# Altium PCB PCB_RAM & MAR - 1.0_2021-12-04.pcbdoc (part 2 of 2)
Units mm, origin at the board's own origin, x right, y up, seen from the top; angles counter-clockwise.
Board outline 124.59 x 200.53 mm, 2 copper layers (Top Layer, Bottom Layer); 69 components, 120 nets, 333 pads, 65 vias.
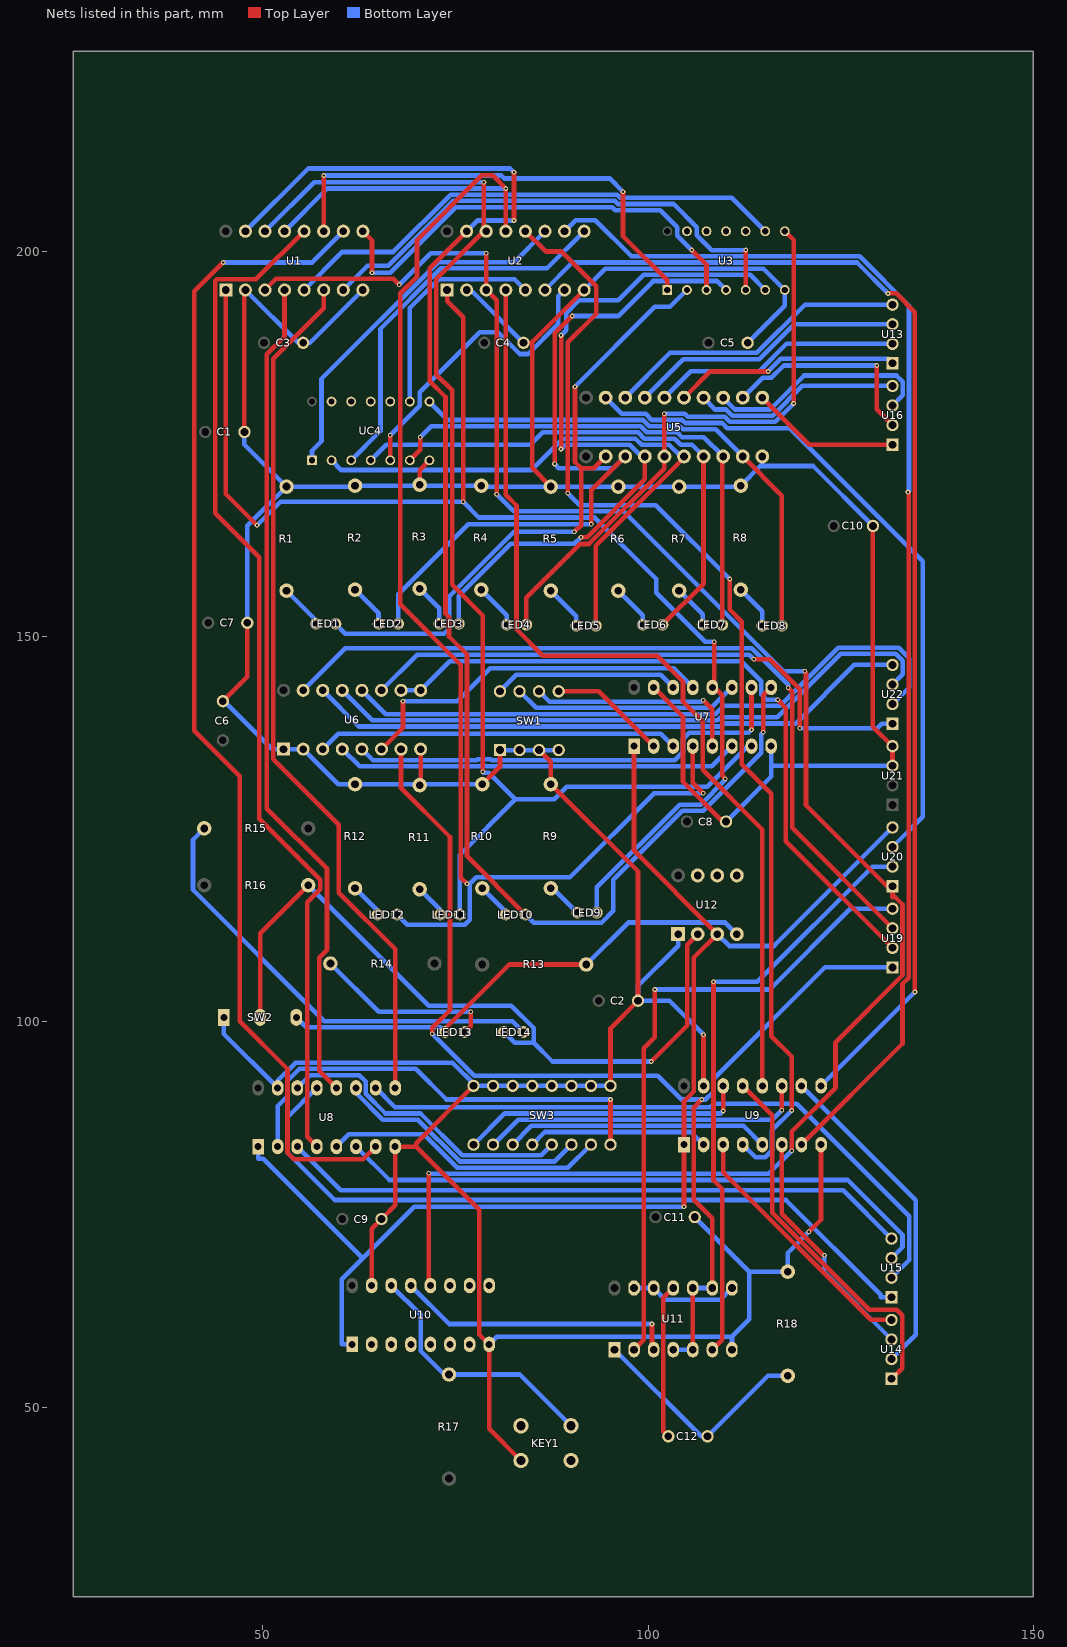
[diagram p2: the nets of this part, all layers, seen from the top]

## Via types
v1: diameter 0.61, hole 0.305, Top Layer to Bottom Layer, 65 vias

## Nets (pads, with @x,y where several pads share a name; then routed paths per layer and width w, separated by ;. In a path a pad name is that pad's centre, name@x,y a point inside that pad or via, vN(x,y) a via of type N, cw(c..) or ccw(c..) an arc to the next point about the centre after c; other vN are vias at no path point) (continued)
GND: C1.2 C2.2 C3.2 C4.2 C5.2 C6.2 C7.2 C8.2 C9.2 C10.2 C11.2 KEY1.1 R1.2 R2.2 R3.2 R4.2 R5.2 R6.2 R7.2 R8.2 R9.2 R10.2 R11.2 R12.2 R18.2 SW1.1 SW1.2 SW1.3 SW1.4 SW2.1 SW3.1 SW3.2 SW3.3 SW3.4 SW3.5 SW3.6 SW3.7 SW3.8 U1.2 U1.8 U2.2 U2.8 U3.7 U5.10 U6.1 U6.2 U6.8 U7.8 U7.15 U8.8 U8.15 U9.8 U9.15 U10.8 U10.15 U11.7 U12.1 U21.3 U21.4 UC4.7 | length 673.4
  Top Layer w0.6: C6.2@44.831,141.605 48.006,144.78 C7.2@48.006,151.765 ; C1.2@47.625,176.53 47.625,194.817 U1.2@47.752,194.944 ; U10.15@64.135,65.786 64.135,73.152 C9.2@65.405,74.422 67.183,76.2 U8.8@67.183,83.82 69.896,83.82 ; R11.2@70.358,130.702 70.485,130.829 U6.8@70.485,135.381 ; R3.2@70.358,169.691 70.358,171.577 UC4.7@71.628,172.847 ; SW3.1@77.343,91.694 69.896,84.247 69.896,83.82 ; R10.2@78.486,130.829 80.773,133.116 SW1.1@80.773,135.256 ; KEY1.1@83.492,43.09 79.375,47.207 U10.8@79.375,58.166 78.105,59.436 78.105,75.611 69.896,83.82 ; C4.2@83.82,188.087 84.941,188.087 ; SW1.3@85.853,135.256 87.376,133.733 87.376,130.829 98.679,119.526 C2.2@98.679,102.743 95.123,99.187 SW3.8@95.123,91.694 ; R5.2@87.376,169.437 84.941,171.872 84.941,188.087 ; U2.8@91.694,194.944 84.941,188.192 84.941,188.087 ; U7.15@100.711,143.383 104.521,139.573 104.521,131.163 109.7,125.984 C8.2@110.109,125.984 ; U9.15@107.188,91.694 v1(107.188,98.322) ; v1(120.846,72.755) 122.428,74.336 U9.8@122.428,84.074 ; C10.2@129.159,164.338 129.159,138.303 U21.4@131.699,135.763 U21.3@131.699,133.223
  Bottom Layer w0.6: C6.2@44.831,141.605 45.03,141.605 51.254,135.381 U6.1@52.705,135.381 U6.2@55.245,135.381 59.797,130.829 61.976,130.829 70.231,130.829 70.358,130.702 70.485,130.829 R10.2@78.486,130.829 ; SW2.1@44.958,100.584 44.958,98.425 U8.15@51.943,91.44 51.943,92.39 54.258,94.705 74.617,94.705 77.628,91.694 SW3.1@77.769,91.694 ; C1.2@47.625,176.53 47.625,174.898 R1.2@53.086,169.437 ; U1.2@47.752,194.944 54.609,188.087 C3.2@55.245,188.087 56.135,188.087 U1.8@62.992,194.944 ; C7.2@48.006,151.765 48.006,164.357 R1.2@53.086,169.437 ; U2.2@76.454,194.944 76.963,194.944 C4.2@83.82,188.087 ; SW3.1@77.343,91.694 SW3.1@77.769,91.694 ; U10.8@79.375,58.166 80.356,59.147 110.871,59.147 ; SW1.1@80.773,135.256 SW1.2@83.313,135.256 SW1.3@85.853,135.256 SW1.4@88.393,135.256 ; U2.8@91.694,194.944 94.457,197.708 114.966,197.708 U3.7@117.729,194.945 117.729,192.913 C5.2@112.903,188.087 ; SW3.8@95.123,91.694 SW3.7@92.583,91.694 SW3.6@90.043,91.694 SW3.5@87.503,91.694 SW3.4@84.963,91.694 SW3.3@82.423,91.694 SW3.2@79.883,91.694 SW3.1@77.769,91.694 ; U12.1@103.886,111.379 103.886,109.878 98.679,104.671 C2.2@98.679,102.743 102.767,102.743 v1(107.188,98.322) ; C11.2@106.045,74.676 113.138,67.583 ; C8.2@110.109,125.984 115.951,131.826 115.951,133.223 ; U11.7@110.871,57.468 110.871,59.147 ; U5.10@114.808,173.355 114.808,172.111 ; U7.8@115.951,135.763 115.951,133.223 ; v1(120.846,72.755) 118.11,70.018 118.11,67.583 113.138,67.583 ; C10.2@129.159,164.338 121.386,172.111 114.808,172.111 ; U21.3@131.699,133.223 115.951,133.223 ; R1.2@53.086,169.437 61.849,169.437 61.976,169.564 70.231,169.564 70.358,169.691 70.485,169.564 78.359,169.564 78.486,169.437 87.376,169.437 96.139,169.437 104.013,169.437 111.887,169.437 112.014,169.564 114.561,172.111 114.808,172.111 ; 110.871,59.147 113.138,61.414 113.138,67.583
KEY1_2: KEY1.2
KEY1_4: KEY1.4
LED5_1: LED5.1 R5.1 | length 5.9
  Bottom Layer w0.6: R5.1@87.376,155.937 90.678,152.635 LED5.1@90.678,151.384
LED6_1: LED6.1 R6.1 | length 5.7
  Bottom Layer w0.6: R6.1@96.139,155.937 99.314,152.762 LED6.1@99.314,151.511
LED7_1: LED7.1 R7.1 | length 5.7
  Bottom Layer w0.6: R7.1@104.013,155.937 107.061,152.889 LED7.1@107.061,151.511
LED8_1: LED8.1 R8.1 | length 5.8
  Bottom Layer w0.6: R8.1@112.014,156.064 114.808,153.27 LED8.1@114.808,151.384
LED13_2: LED13.2 R14.1 | length 23.7
  Top Layer w0.6: LED13.2@76.2,98.679 76.973,99.452 v1(76.973,101.305)
  Bottom Layer w0.6: R14.1@58.782,107.569 65.046,101.305 v1(76.973,101.305)
R1_1: LED1.1 R1.1 | length 5.9
  Bottom Layer w0.6: R1.1@53.086,155.937 56.896,152.127 LED1.1@56.896,151.638
R2_1: LED2.1 R2.1 | length 5.7
  Bottom Layer w0.6: R2.1@61.976,156.064 65.024,153.016 LED2.1@65.024,151.638
R3_1: LED3.1 R3.1 | length 5.6
  Bottom Layer w0.6: R3.1@70.358,156.191 72.898,153.651 LED3.1@72.898,151.638
R4_1: LED4.1 R4.1 | length 5.9
  Bottom Layer w0.6: R4.1@78.359,156.064 81.661,152.762 LED4.1@81.661,151.511
R9_1: LED9.1 R9.1 | length 4.7
  Bottom Layer w0.6: R9.1@87.376,117.329 87.649,117.329 LED9.1@90.805,114.173
R10_1: LED10.1 R10.1 | length 4.7
  Bottom Layer w0.6: R10.1@78.486,117.329 81.534,114.281 LED10.1@81.534,113.919
R11_1: LED11.1 R11.1 | length 4.4
  Bottom Layer w0.6: R11.1@70.358,117.202 73.025,114.535 LED11.1@73.025,113.919
R12_1: LED12.1 R12.1 | length 4.6
  Bottom Layer w0.6: R12.1@61.976,117.329 64.897,114.408 LED12.1@64.897,113.919
R15_1: LED14.2 R15.1 | length 59.1
  Bottom Layer w0.6: R15.1@42.399,125.095 40.949,123.645 40.949,117.113 57.97,100.091 82.408,100.091 LED14.2@83.82,98.679
S$31: 
S$33: 
S$35: 
U1_1: LED9.2 U1.1 U2.1 U7.12 | length 174.2
  Top Layer w0.6: U1.1@45.212,194.944 45.212,168.476 v1(49.261,164.427) ; U2.1@73.914,194.944 73.914,193.493 76.005,191.402 v1(76.005,167.475) ; U7.12@108.331,143.383 U7.12@108.591,143.383 ; v1(108.591,149.305) U7.12@108.591,143.383 ; v1(110.016,131.549) 109.601,131.964 109.601,142.373 U7.12@108.591,143.383
  Bottom Layer w0.6: v1(49.261,164.427) 52.309,167.475 v1(76.005,167.475) 78.06,165.42 93.059,165.42 101.034,157.445 101.034,155.656 107.385,149.305 v1(108.591,149.305) ; LED9.2@93.345,114.173 93.345,117.442 104.085,128.182 106.808,128.182 110.016,131.389 v1(110.016,131.549)
U1_3: U1.3 U2.3 U10.12 U20.1 | length 249.9
  Top Layer w0.6: U1.3@50.292,194.944 51.725,196.378 66.957,196.378 v1(67.693,195.642) ; v1(71.555,80.376) 71.555,65.986 U10.12@71.755,65.786 ; v1(78.994,199.725) U2.3@78.994,194.944 80.338,193.6 v1(80.338,168.426) ; v1(118.618,83.293) 118.618,85.774 124.31,91.466 124.31,97.362 133.001,106.053 133.001,115.224 132.025,116.2 131.699,116.2 U20.1@131.699,116.901 ; v1(120.302,145.466) 120.475,145.292 120.475,128.125 U20.1@131.699,116.901 ; U20.1@131.699,117.602 U20.1@131.699,116.901
  Bottom Layer w0.6: v1(67.693,195.642) 71.776,199.725 v1(78.994,199.725) ; v1(71.555,80.376) 71.647,80.284 115.609,80.284 v1(118.618,83.293) ; v1(80.338,168.426) 82.542,166.223 96.801,166.223 117.559,145.466 v1(120.302,145.466)
U1_4: U1.4 U8.12 | length 109.1
  Top Layer w0.6: U1.4@52.832,194.944 52.832,188.912 50.519,186.599 50.519,127.663 58.345,119.837 58.345,109.329 57.321,108.305 57.321,93.682 U8.12@59.563,91.44
U1_5: U1.5 U3.9 | length 66.9
  Bottom Layer w0.6: U1.5@55.372,194.944 60.304,199.876 66.95,199.876 74.373,207.299 95.997,207.299 96.4,206.896 110.858,206.896 U3.9@115.189,202.565
U1_6: U1.6 U8.9 | length 112.8
  Top Layer w0.6: U1.6@57.912,194.944 57.912,192.596 51.347,186.031 51.347,134.067 59.87,125.545 59.87,116.762 67.183,109.448 U8.9@67.183,91.44
U1_7: U1.7 U3.5 | length 65.4
  Top Layer w0.6: U3.5@112.649,194.945 v1(112.649,200.121)
  Bottom Layer w0.6: U1.7@60.452,194.944 63.592,198.084 66.293,198.084 74.705,206.496 95.665,206.496 96.068,206.093 103.306,206.093 106.299,203.1 106.299,202.055 108.233,200.121 v1(112.649,200.121)
U1_9: U1.9 U3.3 | length 59.8
  Top Layer w0.6: U1.9@62.992,202.565 64.18,201.377 v1(64.18,197.185) ; v1(105.64,200.121) 107.569,198.192 U3.3@107.569,194.945
  Bottom Layer w0.6: v1(64.18,197.185) 66.529,197.185 75.038,205.694 95.333,205.694 95.736,205.29 101.572,205.29 103.759,203.103 103.759,202.002 v1(105.64,200.121)
U1_10: U1.10 U8.7 | length 151.8
  Top Layer w0.6: v1(44.87,198.514) 41.111,194.755 41.111,137.777 47.024,131.865 47.024,100.076 53.213,93.887 53.213,83.031 54.058,82.186 63.009,82.186 U8.7@64.643,83.82
  Bottom Layer w0.6: v1(44.87,198.514) 56.402,198.514 U1.10@60.452,202.565
U1_11: U1.11 U3.1 | length 62.1
  Top Layer w0.6: U1.11@57.912,202.565 v1(57.912,209.792) ; v1(96.734,207.703) 96.734,201.936 102.489,196.181 U3.1@102.489,194.945
  Bottom Layer w0.6: v1(57.912,209.792) 80.954,209.792 81.333,209.413 95.024,209.413 v1(96.734,207.703)
U1_12: U1.12 U8.4 | length 133.4
  Top Layer w0.6: U1.12@55.372,202.565 49.12,196.313 44.035,196.313 43.86,196.137 43.86,165.981 49.562,160.279 49.562,126.35 57.461,118.451 57.461,117.21 55.753,115.502 55.753,85.09 U8.4@57.023,83.82
U1_13: LED12.2 U1.13 U2.13 U7.4 | length 197.3
  Top Layer w0.6: v1(76.506,117.906) 75.703,118.709 75.703,146.297 67.828,154.173 67.828,194.506 70.008,196.686 70.008,201.404 78.41,209.806 79.835,209.806 v1(81.534,208.107) U2.13@81.534,202.565 ; U7.4@105.791,135.763 105.791,131.034 v1(107.155,129.67)
  Bottom Layer w0.6: U1.13@52.832,202.565 58.374,208.107 v1(81.534,208.107) ; LED12.2@67.437,113.919 68.744,112.612 76.207,112.612 76.843,113.248 76.843,117.906 ; v1(76.506,117.906) 76.843,117.906 ; v1(107.155,129.67) 100.764,129.67 89.865,118.771 77.708,118.771 76.843,117.906
U1_14: LED11.2 U1.14 U2.14 U7.7 | length 170
  Top Layer w0.6: v1(78.536,132.436) 78.536,152.712 74.563,156.686 74.563,181.913 72.504,183.971 72.504,196.373 U2.14@78.695,202.564 ; v1(78.695,208.935) U2.14@78.695,202.564 ; U2.14@78.994,202.565 U2.14@78.695,202.564
  Bottom Layer w0.6: U1.14@50.292,202.565 56.663,208.935 v1(78.695,208.935) ; LED11.2@75.565,113.919 75.565,121.647 82.781,128.864 ; v1(78.536,132.436) 78.639,132.333 79.311,132.333 82.781,128.864 ; U7.7@113.411,135.763 112.941,135.763 107.655,130.478 89.437,130.478 87.824,128.864 82.781,128.864
U1_15: LED10.2 U1.15 U2.15 U7.9 | length 198.7
  Top Layer w0.6: U2.15@76.454,202.565 71.657,197.768 71.657,183.116 73.712,181.061 73.712,152.95 74.168,152.494 74.168,149.993 76.506,147.654 76.506,121.487 LED10.2@84.074,113.919 ; v1(82.592,203.95) v1(82.592,210.221) ; v1(114.93,137.588) 114.93,142.362 U7.9@115.951,143.383
  Bottom Layer w0.6: U1.15@47.752,202.565 55.896,210.708 82.104,210.708 v1(82.592,210.221) ; U2.15@76.454,202.565 77.839,203.95 v1(82.592,203.95) ; LED10.2@84.074,113.919 85.149,112.844 93.943,112.844 95.485,114.386 95.485,118.448 104.417,127.379 107.141,127.379 114.681,134.92 114.681,137.339 v1(114.93,137.588)
U2_4: U2.4 U9.12 | length 125.7
  Top Layer w0.6: U2.4@81.534,194.944 81.534,168.372 82.926,166.981 82.926,150.911 86.347,147.49 101.174,147.49 104.521,144.143 104.521,141.528 107.061,138.988 107.061,132.699 114.808,124.952 U9.12@114.808,91.694
U2_5: U2.5 UC4.9 | length 29.3
  Bottom Layer w0.6: UC4.9@69.088,180.467 69.088,192.605 72.84,196.356 82.662,196.356 U2.5@84.074,194.944
U2_6: U2.6 U9.9 | length 157.6
  Top Layer w0.6: v1(131.106,194.496) 132.166,194.496 134.607,192.055 v1(134.607,103.873)
  Bottom Layer w0.6: U2.6@86.614,194.944 90.18,198.511 127.092,198.511 v1(131.106,194.496) ; U9.9@122.428,91.694 v1(134.607,103.873)
U2_7: U2.7 UC4.5 | length 39.1
  Top Layer w0.6: UC4.5@66.548,172.847 v1(66.548,176.116)
  Bottom Layer w0.6: v1(66.548,176.116) 70.358,179.926 70.358,181.686 78.142,189.469 80.514,189.469 83.344,186.639 84.425,186.639 88.351,190.566 88.351,194.142 U2.7@89.154,194.944
U2_9: U2.9 UC4.3 | length 50.3
  Bottom Layer w0.6: UC4.3@61.468,172.847 65.278,176.657 65.278,189.93 73.099,197.751 86.881,197.751 U2.9@91.694,202.565
U2_10: U2.10 U9.7 | length 164.6
  Top Layer w0.6: U9.7@119.888,84.074 133.001,97.187 133.001,104.918 133.804,105.721 133.804,168.625 v1(133.704,168.725)
  Bottom Layer w0.6: U2.10@89.154,202.565 90.592,204.002 93.156,204.002 97.845,199.314 127.431,199.314 133.84,192.904 133.84,168.861 v1(133.704,168.725)
U2_11: U2.11 UC4.1 | length 48
  Bottom Layer w0.6: UC4.1@56.388,172.847 56.388,174.083 57.624,175.32 57.624,183.412 72.767,198.554 82.604,198.554 U2.11@86.614,202.565
U2_12: U2.12 U9.4 | length 149.5
  Top Layer w0.6: U2.12@84.074,202.565 86.696,199.942 88.714,199.942 93.246,195.41 93.246,191.826 89.587,188.167 v1(89.587,168.573) ; v1(110.572,157.445) 110.572,153.496 112.141,151.927 112.141,133.402 115.979,129.564 115.979,98.143 118.618,95.504 v1(118.618,88.496)
  Bottom Layer w0.6: v1(89.587,168.573) 91.134,167.026 100.991,167.026 v1(110.572,157.445) ; U9.4@112.268,84.074 113.928,82.414 115.183,82.414 116.06,83.292 116.06,85.939 v1(118.618,88.496)
U3_10: U3.10
U3_11: U3.11
U3_12: U3.12
U3_13: U3.13
U5_2: LED1.2 U3.2 U5.2 | length 82.5
  Top Layer w0.6: v1(90.434,163.563) 91.312,164.441 91.312,171.82 ; v1(90.506,182.391) 90.506,172.626 91.312,171.82 ; U5.2@94.488,173.355 92.953,171.82 91.312,171.82
  Bottom Layer w0.6: LED1.2@59.436,151.638 60.71,150.364 73.513,150.364 74.168,151.019 74.168,155.132 82.599,163.563 v1(90.434,163.563) ; v1(90.506,182.391) 100.867,192.751 102.835,192.751 U3.2@105.029,194.945
U5_3: LED2.2 U3.4 U5.3 | length 95.8
  Top Layer w0.6: v1(87.864,172.381) 87.864,189.354 90.071,191.561 v1(90.165,191.561) ; v1(92.627,164.574) 92.627,168.954 U5.3@97.028,173.355
  Bottom Layer w0.6: LED2.2@67.564,151.638 67.564,155.462 76.676,164.574 v1(92.627,164.574) ; v1(87.864,172.381) 88.427,171.818 95.491,171.818 U5.3@97.028,173.355 ; v1(90.165,191.561) 96.095,191.561 100.636,196.102 108.952,196.102 U3.4@110.109,194.945
U5_4: LED3.2 U3.6 U5.4 | length 95.3
  Top Layer w0.6: v1(88.702,174.308) v1(88.702,189.051) ; v1(91.287,162.884) 92.079,162.884 99.568,170.373 U5.4@99.568,173.355
  Bottom Layer w0.6: LED3.2@75.438,151.638 75.438,155.267 82.177,162.006 90.409,162.006 v1(91.287,162.884) ; v1(88.702,174.308) 89.252,174.858 97.627,174.858 99.131,173.355 U5.4@99.568,173.355 ; v1(88.702,189.051) 89.356,189.704 89.356,191.92 91.028,193.592 96.097,193.592 99.41,196.905 113.229,196.905 U3.6@115.189,194.945
U5_5: LED4.2 U3.8 U5.5 | length 76.5
  Top Layer w0.6: LED4.2@84.201,151.511 84.201,155.006 91.193,161.998 92.328,161.998 102.108,171.778 U5.5@102.108,173.355 v1(102.108,178.877) ; U3.8@117.729,202.565 118.867,201.427 v1(118.867,180.213)
  Bottom Layer w0.6: v1(102.108,178.877) 104.766,178.877 105.157,178.486 109.942,178.486 110.603,177.826 116.48,177.826 v1(118.867,180.213)
U5_6: LED5.2 U5.6 UC4.2 | length 75.6
  Top Layer w0.6: LED5.2@93.218,151.384 93.218,161.753 104.648,173.183 U5.6@104.648,173.355
  Bottom Layer w0.6: UC4.2@58.928,172.847 60.191,171.584 84.837,171.584 88.914,175.661 98.361,175.661 99.164,174.858 102.707,174.858 104.211,173.355 U5.6@104.648,173.355
U5_7: LED6.2 U5.7 UC4.4 | length 70
  Top Layer w0.6: LED6.2@101.854,151.511 107.188,156.845 U5.7@107.188,173.355
  Bottom Layer w0.6: UC4.4@64.008,172.847 66.019,174.858 84.716,174.858 86.321,176.464 98.693,176.464 99.496,175.661 103.441,175.661 104.244,174.858 105.685,174.858 U5.7@107.188,173.355
U5_8: LED7.2 U5.8 UC4.6 | length 67
  Top Layer w0.6: UC4.6@69.088,172.847 70.432,174.191 v1(70.432,175.847) ; LED7.2@109.601,151.511 109.601,173.228 U5.8@109.728,173.355
  Bottom Layer w0.6: v1(70.432,175.847) 71.852,177.267 99.026,177.267 99.829,176.464 103.773,176.464 104.39,175.847 107.236,175.847 U5.8@109.728,173.355
U5_9: LED8.2 U5.9 UC4.8 | length 67.7
  Top Layer w0.6: U5.9@112.268,173.355 117.348,168.275 LED8.2@117.348,151.384
  Bottom Layer w0.6: UC4.8@71.628,180.467 74.025,178.07 99.358,178.07 100.161,177.267 104.106,177.267 104.492,176.881 108.742,176.881 U5.9@112.268,173.355
U5_11: U5.11 U16.1 | length 19.4
  Top Layer w0.6: U5.11@114.808,180.975 120.904,174.879 U16.1@131.699,174.879
U5_12: U5.12 U16.2 | length 27.7
  Top Layer w0.6: v1(129.637,185.149) 129.637,179.481 U16.2@131.699,177.419
  Bottom Layer w0.6: U5.12@112.268,180.975 114.86,183.567 115.995,183.567 117.578,185.149 v1(129.637,185.149)
U5_13: U5.13 U16.3 | length 29.7
  Bottom Layer w0.6: U5.13@109.728,180.975 111.271,179.432 115.81,179.432 120.221,183.843 132.213,183.843 133.037,183.019 133.037,181.297 U16.3@131.699,179.959
U5_14: U5.14 U16.4 | length 27.1
  Bottom Layer w0.6: U5.14@107.188,180.975 108.731,179.432 110.132,179.432 110.935,178.629 116.142,178.629 120.012,182.499 U16.4@131.699,182.499
U5_15: U5.15 U13.1 | length 29.4
  Top Layer w0.6: U5.15@104.648,180.975 108.047,184.374 v1(115.581,184.374)
  Bottom Layer w0.6: v1(115.581,184.374) 117.209,186.002 131.117,186.002 U13.1@131.699,185.42
U5_16: U5.16 U13.2 | length 32.5
  Bottom Layer w0.6: U5.16@102.108,180.975 105.535,184.402 114.386,184.402 117.945,187.96 U13.2@131.699,187.96
U5_17: U5.17 U13.3 | length 36.1
  Bottom Layer w0.6: U5.17@99.568,180.975 104.574,185.981 114.429,185.981 118.948,190.5 U13.3@131.699,190.5
U5_18: U5.18 U13.4 | length 39.7
  Bottom Layer w0.6: U5.18@97.028,180.975 102.837,186.784 114.097,186.784 120.353,193.04 U13.4@131.699,193.04
U5_19: U5.19 U20.3 | length 88.6
  Bottom Layer w0.6: U5.19@94.488,180.975 96.59,178.873 99.69,178.873 100.493,178.07 104.438,178.07 104.825,177.683 109.61,177.683 110.27,177.023 118.361,177.023 135.612,159.772 135.612,126.595 U20.3@131.699,122.682
U6_7: U6.7 U11.4 U11.5 U11.9 U11.10 U19.1 | length 150.8
  Top Layer w0.6: U6.7@67.945,135.381 67.945,130.328 74.295,123.978 74.295,101.518 72.009,99.232 v1(72.009,98.448) ; U11.5@105.791,57.468 U11.10@105.791,65.468 ; v1(106.969,89.933) 105.918,88.882 105.918,76.93 108.331,74.517 U11.9@108.331,65.468
  Bottom Layer w0.6: v1(72.009,98.448) 77.461,92.997 101.225,92.997 104.288,89.933 v1(106.969,89.933) 107.495,89.933 108.458,90.896 108.458,92.576 122.943,107.061 130.297,107.061 U19.1@131.699,107.061 ; U11.4@103.251,57.468 U11.5@105.791,57.468 ; U11.10@105.791,65.468 U11.9@108.331,65.468
U6_9: U6.9 U6.10 U19.2 | length 91.8
  Top Layer w0.6: v1(116.79,141.802) 117.872,140.72 117.872,123.428 U19.2@131.699,109.601
  Bottom Layer w0.6: U6.10@67.945,143.002 U6.9@70.485,143.002 74.24,146.757 112.094,146.757 114.681,144.169 114.681,142.47 115.35,141.802 v1(116.79,141.802)
U6_11: U6.11 U22.1 | length 75.4
  Top Layer w0.6: v1(113.716,147.028) 115.76,147.028 119.668,143.121 v1(119.668,138.084)
  Bottom Layer w0.6: U6.11@65.405,143.002 70.044,147.641 113.103,147.641 v1(113.716,147.028) ; v1(119.668,138.084) 129.697,138.084 130.297,138.684 U22.1@131.699,138.684
U6_12: U6.12 U22.2 | length 83.2
  Bottom Layer w0.6: U6.12@62.865,143.002 65.946,139.92 108.716,139.92 109.79,140.994 117.125,140.994 124.664,148.534 132.492,148.534 133.85,147.176 133.85,143.375 U22.2@131.699,141.224
U6_13: U6.13 U22.3 | length 81.9
  Bottom Layer w0.6: U6.13@60.325,143.002 64.209,139.118 109.048,139.118 109.432,139.502 116.767,139.502 124.996,147.731 132.128,147.731 133.028,146.831 133.028,145.093 U22.3@131.699,143.764
U6_14: U6.14 U22.4 | length 79.2
  Bottom Layer w0.6: U6.14@57.785,143.002 62.472,138.315 109.38,138.315 109.764,138.699 119.142,138.699 126.747,146.304 U22.4@131.699,146.304
U6_15: U6.15 U19.3 | length 104.3
  Top Layer w0.6: v1(118.159,143.355) 118.675,142.839 118.675,125.165 U19.3@131.699,112.141
  Bottom Layer w0.6: U6.15@55.245,143.002 60.687,148.444 113.442,148.444 118.159,143.726 v1(118.159,143.355)
U7_2: SW1.5 U7.2 | length 15.3
  Top Layer w0.6: SW1.5@88.393,142.876 93.598,142.876 U7.2@100.711,135.763
U7_3: U6.3 U7.3 | length 47
  Bottom Layer w0.6: U6.3@57.785,135.381 59.786,137.382 101.632,137.382 U7.3@103.251,135.763
U7_5: SW1.6 U7.5 | length 28.4
  Top Layer w0.6: v1(107.165,141.734) 108.331,140.568 U7.5@108.331,135.763
  Bottom Layer w0.6: SW1.6@85.853,142.876 87.203,141.526 106.957,141.526 v1(107.165,141.734)
U7_6: U6.4 U7.6 | length 52.7
  Bottom Layer w0.6: U6.4@60.325,135.381 62.57,133.137 78.096,133.137 78.202,133.243 78.871,133.243 78.977,133.137 108.245,133.137 U7.6@110.871,135.763
U7_10: U6.5 U7.10 | length 59.3
  Top Layer w0.6: v1(113.411,137.892) U7.10@113.411,143.383
  Bottom Layer w0.6: U6.5@62.865,135.381 64.307,133.94 77.764,133.94 77.87,134.046 79.578,134.046 79.685,133.94 103.448,133.94 104.521,135.012 104.521,136.659 105.356,137.494 113.013,137.494 v1(113.411,137.892)
U7_11: SW1.7 U7.11 | length 29.6
  Bottom Layer w0.6: SW1.7@83.313,142.876 85.466,140.723 108.211,140.723 U7.11@110.871,143.383
U7_13: U6.6 U7.13 | length 47.8
  Top Layer w0.6: U6.6@65.405,135.381 68.202,138.178 v1(68.202,141.588)
  Bottom Layer w0.6: v1(68.202,141.588) 75.235,141.588 79.509,145.863 103.311,145.863 U7.13@105.791,143.383
U7_14: SW1.8 U7.14 | length 24
  Bottom Layer w0.6: SW1.8@80.773,142.876 82.915,145.017 101.617,145.017 U7.14@103.251,143.383
U8_2: SW3.9 U8.2 | length 59.1
  Top Layer w0.6: SW3.9@95.123,84.074 v1(95.123,89.928)
  Bottom Layer w0.6: U8.2@51.943,83.82 51.943,89.087 53.213,90.357 53.213,92.341 54.769,93.897 69.867,93.897 73.836,89.928 v1(95.123,89.928)
U8_3: U8.3 U15.4 | length 82
  Bottom Layer w0.6: U8.3@54.483,83.82 60.144,78.159 125.295,78.159 U15.4@131.572,71.882
U8_5: SW3.10 U8.5 | length 36.7
  Bottom Layer w0.6: U8.5@59.563,83.82 61.144,85.401 70.912,85.401 75.226,81.087 89.596,81.087 SW3.10@92.583,84.074
U8_6: U8.6 U15.3 | length 79.2
  Bottom Layer w0.6: U8.6@62.103,83.82 66.442,79.481 125.882,79.481 132.993,72.37 132.993,70.763 U15.3@131.572,69.342
U8_10: U8.10 U15.2 | length 85.5
  Bottom Layer w0.6: U8.10@64.643,91.44 67.163,88.92 108.055,88.92 108.514,89.379 119.295,89.379 133.872,74.802 133.872,69.102 U15.2@131.572,66.802
U8_11: SW3.11 U8.11 | length 33.2
  Bottom Layer w0.6: U8.11@62.103,91.44 62.103,90.801 65.593,87.311 70.137,87.311 75.558,81.89 87.859,81.89 SW3.11@90.043,84.074
U8_13: U8.13 U15.1 | length 96.3
  Bottom Layer w0.6: U8.13@57.023,91.44 53.213,87.63 53.213,83.028 59.356,76.885 117.876,76.885 130.17,64.59 130.17,64.262 U15.1@131.572,64.262
U8_14: SW3.12 U8.14 | length 39.5
  Bottom Layer w0.6: U8.14@54.483,91.44 56.137,93.094 62.539,93.094 63.373,92.26 63.373,90.667 65.925,88.114 70.469,88.114 75.89,82.693 86.122,82.693 SW3.12@87.503,84.074
U9_2: SW3.13 U9.2 | length 23.6
  Bottom Layer w0.6: SW3.13@84.963,84.074 86.597,85.708 105.554,85.708 U9.2@107.188,84.074
U9_3: U9.3 U14.4 | length 33.4
  Top Layer w0.6: U9.3@109.728,84.074 109.728,80.461 128.858,61.331 U14.4@131.572,61.331
U9_5: SW3.14 U9.5 | length 34.4
  Bottom Layer w0.6: SW3.14@82.423,84.074 84.86,86.511 112.371,86.511 U9.5@114.808,84.074
U9_6: U9.6 U14.3 | length 31.3
  Top Layer w0.6: U9.6@117.348,84.074 117.348,75.111 122.726,69.733 v1(122.868,69.733)
  Bottom Layer w0.6: v1(122.868,69.733) 122.868,67.495 U14.3@131.572,58.791
U9_10: U9.10 U14.2 | length 42.9
  Bottom Layer w0.6: U9.10@119.888,91.694 134.71,76.872 134.71,59.389 U14.2@131.572,56.251
U9_11: SW3.15 U9.11 | length 42.5
  Top Layer w0.6: v1(117.348,88.543) U9.11@117.348,91.694
  Bottom Layer w0.6: SW3.15@79.883,84.074 83.123,87.314 116.119,87.314 v1(117.348,88.543)
U9_13: U9.13 U14.1 | length 49.2
  Top Layer w0.6: U9.13@112.268,91.694 116.078,87.884 116.078,75.246 128.683,62.641 132.24,62.641 132.948,61.933 132.948,55.087 U14.1@131.572,53.711
U9_14: SW3.16 U9.14 | length 37.4
  Top Layer w0.6: v1(109.728,88.44) U9.14@109.728,91.694
  Bottom Layer w0.6: SW3.16@77.343,84.074 81.386,88.117 109.405,88.117 v1(109.728,88.44)
U10_2: U10.2
U10_3: U10.3
U10_4: U10.4
U10_5: U10.5
U10_6: U10.6
U10_7: U10.7
U10_9: U10.9
U10_10: U10.10
U10_11: U10.11
U10_13: U10.13 U11.3 | length 36.8
  Top Layer w0.6: v1(100.498,60.807) 100.498,57.681 U11.3@100.711,57.468
  Bottom Layer w0.6: U10.13@69.215,65.786 74.194,60.807 v1(100.498,60.807)
U10_14: KEY1.3 R17.2 U10.14 | length 33.6
  Bottom Layer w0.6: U10.14@66.675,65.786 70.485,61.976 70.485,57.297 73.534,54.248 74.168,54.248 83.334,54.248 KEY1.3@89.992,47.589
U11_1: C12.2 R18.1 U11.1 | length 30.4
  Bottom Layer w0.6: U11.1@95.631,57.468 106.871,46.228 C12.2@107.696,46.228 115.551,54.083 R18.1@118.11,54.083
U11_6: U11.6 U20.2 | length 78.1
  Top Layer w0.6: U11.6@108.331,57.468 109.601,58.738 109.601,78.318 108.476,79.443 v1(108.476,105.211)
  Bottom Layer w0.6: v1(108.476,105.211) 114.174,105.211 129.105,120.142 U20.2@131.699,120.142
U11_8: U11.8 U11.12 U11.13 | length 14
  Bottom Layer w0.6: U11.13@98.171,65.468 U11.12@100.711,65.468 102.237,63.942 109.345,63.942 U11.8@110.871,65.468
U11_11: C12.1 U11.11 | length 20
  Top Layer w0.6: C12.1@102.616,46.228 101.981,46.863 101.981,64.198 U11.11@103.251,65.468
U12_2: LED14.1 R16.2 SW2.2 U12.2 | length 98.3
  Top Layer w0.6: SW2.2@49.658,100.584 49.658,111.488 R16.2@55.899,117.729 ; v1(100.384,94.861) 105.048,99.525 105.048,110.001 U12.2@106.426,111.379
  Bottom Layer w0.6: R16.2@55.899,117.729 71.516,102.112 82.256,102.112 85.171,99.197 85.171,97.276 ; LED14.1@81.28,98.679 82.683,97.276 85.171,97.276 ; v1(100.384,94.861) 87.586,94.861 85.171,97.276
U12_3: U7.1 U8.1 U9.1 U10.1 U12.3 U20.4 | length 174.4
  Top Layer w0.6: U7.1@98.171,135.763 98.171,122.174 U12.3@108.966,111.379 105.936,108.349 105.936,90.96 104.648,89.673 U9.1@104.648,84.074 v1(104.648,76.004)
  Bottom Layer w0.6: U8.1@49.403,83.82 49.403,82.219 50.091,82.219 62.983,69.326 ; U10.1@61.595,58.166 60.243,58.166 60.243,66.586 62.983,69.326 ; v1(104.648,76.004) 69.661,76.004 62.983,69.326 ; U12.3@108.966,111.379 110.497,109.848 116.325,109.848 U20.4@131.699,125.222
U12_4: LED13.1 R13.2 SW2.3 U12.4 | length 64.7
  Top Layer w0.6: LED13.1@73.66,98.679 73.66,99.133 81.969,107.442 R13.2@91.967,107.442
  Bottom Layer w0.6: SW2.3@54.358,100.584 55.654,99.288 73.051,99.288 LED13.1@73.66,98.679 ; R13.2@91.967,107.442 97.407,112.882 110.003,112.882 U12.4@111.506,111.379
U12_5: U12.5
U12_6: U12.6
U12_7: U12.7
U19_4: U11.2 U19.4 | length 83
  Top Layer w0.6: U11.2@98.171,57.468 99.441,58.738 99.441,96.56 100.876,97.995 v1(100.876,104.197)
  Bottom Layer w0.6: v1(100.876,104.197) 115.754,104.197 126.238,114.681 U19.4@131.699,114.681
UC4_10: UC4.10
UC4_11: UC4.11
UC4_12: UC4.12
UC4_13: UC4.13

## Silkscreen, mask and mechanical layers (free items; w line width, h text height)
Top Overlay:
  text "RAM & MAR" at 72.39,204.685 h4.14
  text "OBEL" at 125.73,203.549 h1.14
  text "BUS6" at 121.031,191.707 h1.14
  text "BUS6" at 121.031,189.293 h1.14
  text "BUS5" at 121.158,186.626 h1.14
  text "BUS4" at 121.285,183.959 h1.14
  text "BUS3" at 121.031,181.165 h1.14
  text "BUS2" at 121.031,178.752 h1.14
  text "BUS1" at 121.158,176.085 h1.14
  text "BUS0" at 121.285,173.418 h1.14
  text "BUS6" at 121.285,144.97 h1.14
  text "BUS2" at 121.285,142.558 h1.14
  text "BUS1" at 121.412,139.891 h1.14
  text "BUS0" at 121.539,137.224 h1.14
  text "GND" at 121.285,134.429 h1.14
  text "GND" at 121.285,132.017 h1.14
  text "+5V_LOOP" at 121.412,129.35 h1.14
  text "+5V" at 121.539,126.682 h1.14
  text "XOR/NOT" at 121.315,123.889 h1.14 r3
  text "RAM_OUT" at 121.285,121.475 h1.14
  text "/CLOCK" at 121.442,118.809 h1.14 r3
  text "/WE" at 121.599,116.145 h1.14 r6
  text "RAM_IN" at 121.285,113.347 h1.14
  text "RESERT" at 121.285,110.934 h1.14
  text "/MAR_IN" at 121.412,108.267 h1.14
  text "CLOCK" at 121.539,105.6 h1.14
  text "NULL" at 121.158,70.549 h1.14
  text "RAM_OUT" at 121.158,68.135 h1.14
  text "/CLOCK" at 121.315,65.469 h1.14 r3
  text "/WE" at 121.472,62.805 h1.14 r6
  text "RAM_IN" at 121.158,60.008 h1.14
  text "RESERT" at 121.158,57.594 h1.14
  text "/MAR_IN" at 121.285,54.927 h1.14
  text "CLOCK" at 121.412,52.261 h1.14

## Text inside footprints (layer, text, board x,y; h text height)
SW1: Top Overlay "1" at 80.383,136.745 h1 r180; Top Overlay "2" at 82.923,136.766 h1 r180; Top Overlay "3" at 85.523,136.766 h1 r180; Top Overlay "4" at 88.41,136.675 h1 r145
SW3: Top Overlay "1" at 77.246,85.614 h0.5 r180; Top Overlay "2" at 79.774,85.624 h0.5 r180; Top Overlay "3" at 82.233,85.624 h0.5 r180; Top Overlay "ON" at 76.662,89.684 h0.8; Top Overlay "4" at 84.843,85.556 h0.5 r144; Top Overlay "5" at 87.394,85.624 h0.5 r180; Top Overlay "6" at 89.892,85.624 h0.5 r185; Top Overlay "7" at 92.6,85.571 h0.5 r155; Top Overlay "8" at 95.072,85.624 h0.5 r180